# Altium PCB Device.PcbDoc (part 3 of 4)
Units mm, origin at the board's own origin, x right, y up, seen from the top; angles counter-clockwise.
Board outline 139.06 x 99.82 mm, 4 copper layers (Top Layer, GND, PWR, Bottom Layer), stack 1.233 mm thick; 189 components, 163 nets, 636 pads, 1007 vias.
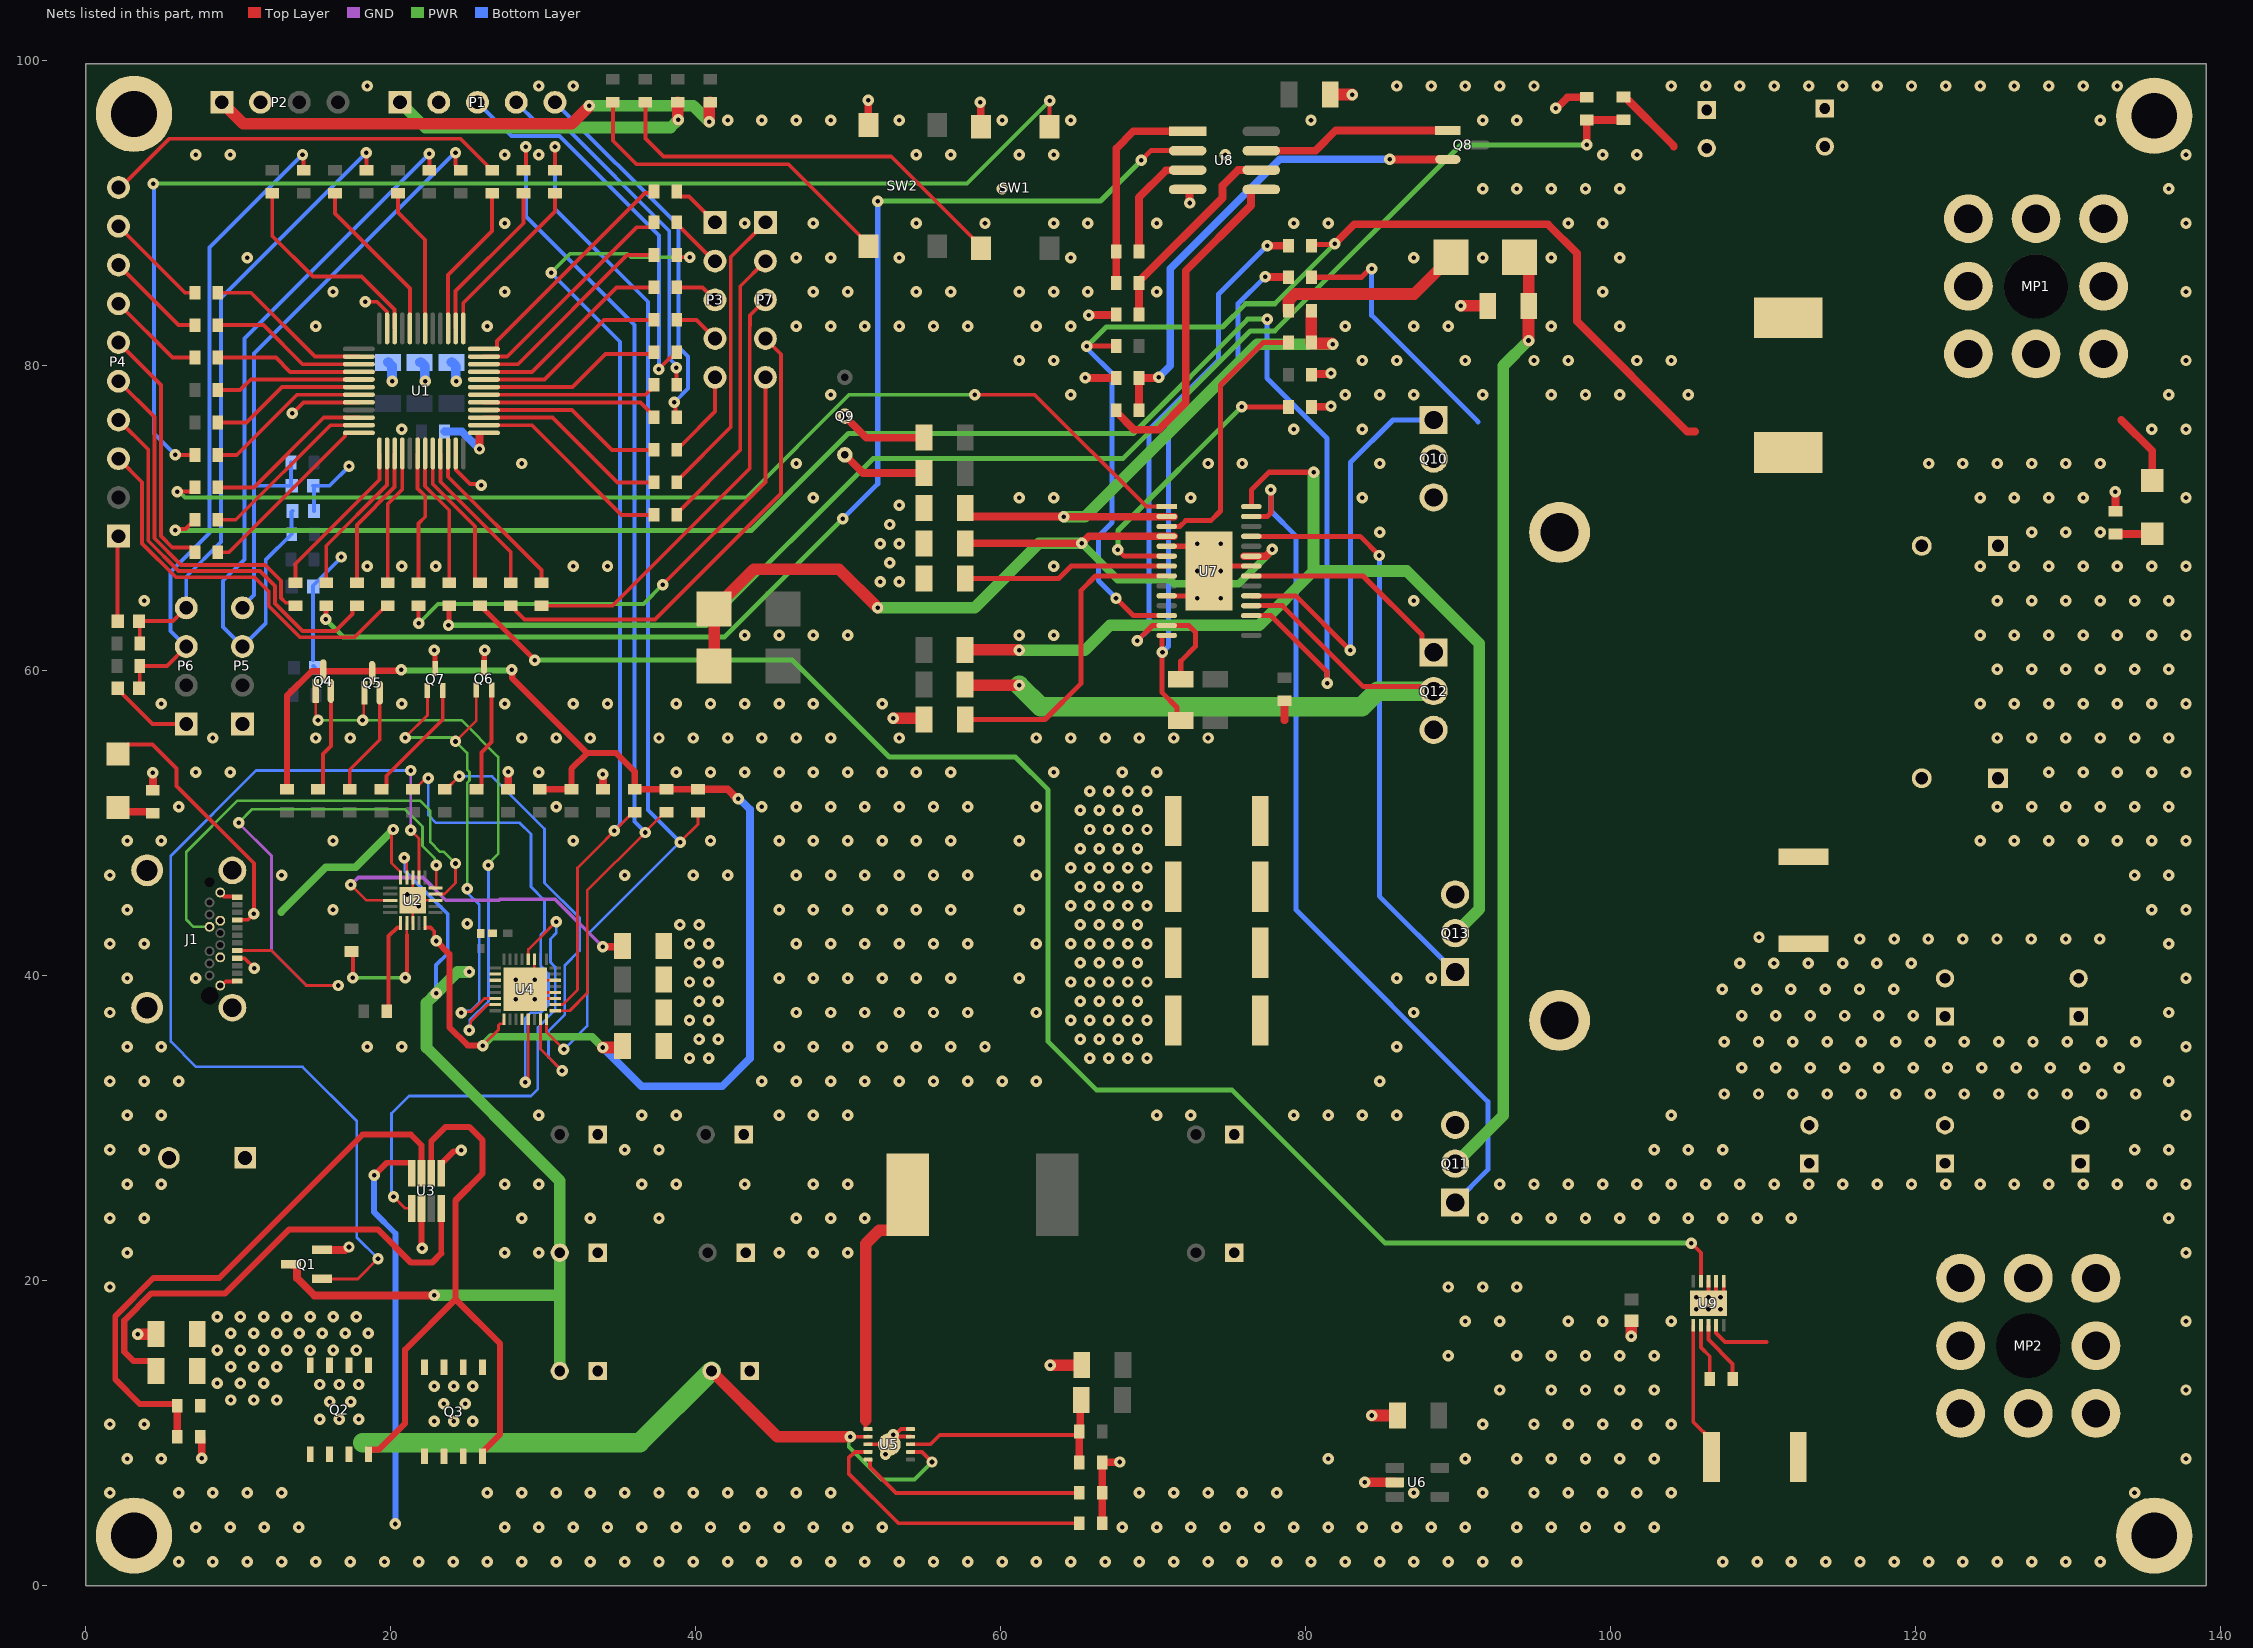
[diagram p4: the nets of this part, all layers, seen from the top]

## Via types
v1: diameter 0.75, hole 0.3, Top Layer to Bottom Layer, tented both sides, 1006 vias
v2: diameter 0.75, hole 0.3, Top Layer to Bottom Layer, tented top, 1 vias

## Nets (pads, with @x,y where several pads share a name; then routed paths per layer and width w, separated by ;. In a path a pad name is that pad's centre, name@x,y a point inside that pad or via, vN(x,y) a via of type N, cw(c..) or ccw(c..) an arc to the next point about the centre after c; other vN are vias at no path point) (continued)
GND: C1.1 C2.1 C3.1 C4.1 C5.1 C6.1 C7.2 C8.1 C9.1 C10.1 C12.1 C13.1 C14.1 C15.1 C16.1 C17.1 C18.1 C19.1 C20.1 C22.1 C23.1 C24.1 C25.1 C26.1 C27.1 C28.1 C29.1 C30.1 C31.1 C32.1 C33.1 C34.2 C35.1 C37.2 C41.1 C42.1 C43.1 C44.1 C45.1 C46.1 C47.1 C48.1 C49.1 C51.1 J1.3@9.632,46.918 J1.4 J1.5 J1.6 J1.A1 J1.A12 J1.B1 J1.B12 P1.2 P2.2 P4.1 P5.1 P6.1 pad.MH1 pad.MH2 pad.MH3 pad.MH4 Q6.3 Q7.3 Q9.2 R54.1 R58.1 R67.1 R68.1 R70.1 R71.1 R72.1 R76.1 R80.2 R81.1 R82.2 R88.1 R89.1 R90.1 R91.1 R92.1 R94.1 R96.1 SW1.3 SW2.3 U1.8 U1.23 U1.47 U2.8 U2.13 U2.18 U2.21 U3.2 U4.11 U4.12 U4.14 U4.19 U4.33 U5.3 U5.9 U5.10 U5.11 U6.2 U7.5 U7.10 U7.22 U7.29 U8.4 U9.1 U9.6 U9.7 U9.8 U9.11 U9.V | length 127.1
  Top Layer w0.178: U2.8@21.463,43.467 U2.21@21.463,44.958 ; U2.18@21.463,46.449 U2.21@21.463,44.958 ; U2.13@22.954,44.958 U2.21@21.463,44.958 ; U4.19@29.429,41.082 U4.33@29.429,39.716 ; v1(29.464,38.481) 29.029,38.916 U4.33@29.851,38.916 ; v1(29.464,39.751) U4.33@29.429,39.716 ; U4.11@30.795,38.516 30.162,38.516 29.851,38.827 U4.33@29.851,38.916 ; U4.12@30.795,38.916 U4.33@29.851,38.916 ; U4.14@30.795,39.716 U4.33@29.429,39.716 ; U4.33@29.429,39.716 U4.33@28.829,39.116 29.651,39.116 U4.33@29.851,38.916
  Top Layer w0.254: C5.1@2.106,58.858 2.106,58.808 4.399,56.515 P6.1@6.604,56.515 ; C4.1@2.106,63.259 2.106,68.781 P4.1@2.159,68.834 ; J1.B12@8.705,45.468 8.812,45.468 9.066,45.214 9.598,45.214 J1.A1@9.602,45.219 ; J1.B1@8.832,39.368 8.939,39.368 9.193,39.622 9.719,39.622 J1.A12@9.731,39.633 ; v1(13.562,76.887) 14.284,77.608 U1.8@17.919,77.608 ; v1(18.336,84.2) 19.106,84.2 19.76,83.546 19.76,82.467 U1.47@19.769,82.458 ; U1.23@24.269,74.258 24.277,74.25 24.277,73.17 25.2,72.248 25.884,72.248 v1(25.956,72.176) ; U5.3@51.302,9.287 U5.11@52.702,9.287 ; 53.34,9.779 53.348,9.787 U5.9@54.102,9.787 ; 53.34,10.16 53.467,10.287 U5.10@54.102,10.287 ; U9.1@105.413,17.094 105.413,10.748 106.603,9.558 R94.1@106.603,8.458 ; U9.V@105.626,18.014 U9.V@105.626,18.148 ; U9.V@106.413,18.936 U9.8@106.413,19.99 ; U9.7@106.913,19.99 106.913,19.314 107.201,19.026 U9.V@107.201,18.954 ; U9.V@107.201,18.936 U9.V@107.201,18.954 ; U9.6@107.413,19.99 107.413,19.167 U9.V@107.201,18.954
  Top Layer w0.33: v1(22.86,61.341) 22.901,61.3 22.901,60.177 Q7.3@22.918,60.16 ; Q6.3@26.124,60.198 26.141,60.215 26.141,61.32 v1(26.162,61.341) ; U7.10@70.885,64.923 72.275,64.923 73.66,66.308 U7.29@73.66,66.548 ; U7.5@70.885,68.173 72.275,68.173 73.66,66.788 U7.29@73.66,66.548 ; U7.29@74.422,66.675 U7.29@74.224,66.873 ; U7.22@76.435,66.873 U7.29@74.224,66.873 ; U7.29@73.66,66.548 73.985,66.873 U7.29@74.224,66.873
  Top Layer w0.381: U3.2@22.027,24.757 22.027,22.169 v1@22.098,22.098
  Top Layer w0.508: R58.1@4.414,52.171 v1(4.414,53.326) ; R54.1@7.519,9.779 7.615,9.683 7.615,9.391 7.62,9.386 v1(7.62,8.382) ; R67.1@27.705,52.239 27.711,52.246 27.711,53.375 v1(27.718,53.382) ; v1(33.909,53.213) 33.934,53.188 R68.1@33.934,52.239 ; Q9.2@49.784,76.708 51.198,75.294 C35.1@54.977,75.294 ; v1(51.308,97.409) 51.326,97.391 51.326,95.814 SW2.3@51.344,95.796 ; C34.2@54.891,56.896 C34.2@54.977,56.81 ; v1(58.674,97.282) 58.692,97.264 58.692,95.687 SW1.3@58.71,95.669 ; v1@65.532,79.248 v1(65.557,79.223) 65.583,79.197 R81.1@67.576,79.197 ; v1(65.786,83.312) 65.816,83.342 67.546,83.342 R80.2@67.576,83.371 ; R71.1@66.656,4.112 R72.1@66.656,6.104 R70.1@66.656,8.097 66.672,8.113 67.803,8.113 v1(67.818,8.128) ; U8.4@72.262,91.567 72.337,91.567 72.39,91.514 v1(72.39,90.678) ; R82.2@80.379,77.301 80.4,77.322 81.64,77.322 v1(81.661,77.343) ; R92.1@80.379,79.417 80.421,79.46 81.619,79.46 v1(81.661,79.502) ; v1(96.393,96.901) 96.458,96.901 97.175,97.618 R96.1@98.425,97.618 ; R76.1@133.096,70.473 v1(133.096,71.755)
  Top Layer w0.635: v1(83.886,6.792) U6.2@85.852,6.792
  Top Layer w0.762: v1(3.429,16.51) C12.1@4.619,16.51 ; v1(52.959,56.896) C34.2@54.891,56.896 ; v1(63.246,14.478) C26.1@65.325,14.478 ; C31.1@81.614,97.79 v1(83.058,97.79) ; v1(84.328,11.176) C23.1@86.026,11.176 ; v1(90.17,83.947) 90.183,83.934 C32.1@91.934,83.934 ; v1(101.346,16.383) 101.346,17.366 101.365,17.385 C51.1@101.367,17.385
  Bottom Layer w0.254: 14.924,60.706 C3.1@14.924,65.532 ; C3.1@14.924,65.582 16.764,67.422 v1(16.764,67.468) ; C6.1@14.936,60.325 C6.1@15.063,60.198 ; C2.1@14.974,70.485 14.974,72.086 C1.1@14.924,72.136 16.002,72.136 v1(17.272,73.406)
  Bottom Layer w0.635: C27.1@19.824,80.228 19.859,80.228 20.092,79.996 20.092,79.015 v1(20.114,78.993) ; C28.1@21.907,80.228 22.018,80.228 22.251,79.996 22.251,79.015 v1(22.273,78.993) ; C29.1@23.991,80.228 24.05,80.228 24.283,79.996 24.283,79.015 v1(24.305,78.993)
  other v1: 6.1,1.6 8.35,1.6 10.6,1.6 12.85,1.6 15.1,1.6 17.35,1.6 19.6,1.6 21.85,1.6 24.1,1.6 26.35,1.6 28.6,1.6 30.85,1.6 33.1,1.6 35.35,1.6 37.6,1.6 39.85,1.6 42.1,1.6 44.35,1.6 46.6,1.6 48.85,1.6 51.1,1.6 53.35,1.6 55.6,1.6 57.85,1.6 60.1,1.6 62.35,1.6 64.6,1.6 66.85,1.6 69.1,1.6 71.35,1.6 73.6,1.6 75.85,1.6 78.1,1.6 80.35,1.6 82.6,1.6 84.85,1.6 87.1,1.6 89.35,1.6 91.6,1.6 93.85,1.6 107.35,1.6 109.6,1.6 111.85,1.6 114.1,1.6 116.35,1.6 118.6,1.6 120.85,1.6 123.1,1.6 125.35,1.6 127.6,1.6 129.85,1.6 132.1,1.6 7.225,3.85 9.475,3.85 11.725,3.85 13.975,3.85 27.475,3.85 29.725,3.85 31.975,3.85 34.225,3.85 36.475,3.85 38.725,3.85 40.975,3.85 43.225,3.85 45.475,3.85 47.725,3.85 49.975,3.85 52.225,3.85 67.975,3.85 70.225,3.85 72.475,3.85 74.725,3.85 76.975,3.85 79.225,3.85 81.475,3.85 83.725,3.85 85.975,3.85 88.225,3.85 90.475,3.85 93.85,3.85 96.1,3.85 98.35,3.85 100.6,3.85 102.85,3.85 1.6,6.1 6.1,6.1 8.35,6.1 10.6,6.1 12.85,6.1 26.35,6.1 28.6,6.1 30.85,6.1 33.1,6.1 35.35,6.1 37.6,6.1 39.85,6.1 42.1,6.1 44.35,6.1 46.6,6.1 48.85,6.1 69.1,6.1 71.35,6.1 73.6,6.1 75.85,6.1 78.1,6.1 87.1,6.1 91.6,6.1 94.975,6.1 97.225,6.1 99.475,6.1 101.725,6.1 103.975,6.1 134.35,6.1 2.725,8.35 4.975,8.35 81.475,8.35 90.475,8.35 93.85,8.35 96.1,8.35 98.35,8.35 100.6,8.35 102.85,8.35 137.725,8.35 52.451,8.636 1.6,10.6 3.85,10.6 91.6,10.6 94.975,10.6 97.225,10.6 99.475,10.6 101.725,10.6 103.975,10.6 92.725,12.85 96.1,12.85 98.35,12.85 100.6,12.85 102.85,12.85 137.725,12.85 89.35,15.1 93.85,15.1 96.1,15.1 98.35,15.1 100.6,15.1 102.85,15.1 90.475,17.35 92.725,17.35 97.225,17.35 99.475,17.35 103.975,17.35 137.725,17.35 1.6,19.6 89.35,19.6 91.6,19.6 93.85,19.6 2.725,21.85 27.475,21.85 29.725,21.85 45.475,21.85 47.725,21.85 49.975,21.85 137.725,21.85 22.063,22.134 1.6,24.1 3.85,24.1 28.6,24.1 33.1,24.1 37.6,24.1 46.6,24.1 48.85,24.1 51.1,24.1 91.6,24.1 93.85,24.1 96.1,24.1 98.35,24.1 100.6,24.1 102.85,24.1 105.1,24.1 107.35,24.1 109.6,24.1 111.85,24.1 136.6,24.1 2.725,26.35 4.975,26.35 27.475,26.35 29.725,26.35 36.475,26.35 38.725,26.35 43.225,26.35 47.725,26.35 49.975,26.35 92.725,26.35 94.975,26.35 97.225,26.35 99.475,26.35 101.725,26.35 103.975,26.35 106.225,26.35 108.475,26.35 110.725,26.35 112.975,26.35 115.225,26.35 117.475,26.35 119.725,26.35 121.975,26.35 124.225,26.35 126.475,26.35 128.725,26.35 130.975,26.35 133.225,26.35 135.475,26.35 137.725,26.35 1.6,28.6 3.85,28.6 35.35,28.6 37.6,28.6 102.85,28.6 105.1,28.6 107.35,28.6 134.35,28.6 136.6,28.6 2.725,30.85 4.975,30.85 29.725,30.85 36.475,30.85 38.725,30.85 45.475,30.85 47.725,30.85 49.975,30.85 70.225,30.85 72.475,30.85 79.225,30.85 81.475,30.85 83.725,30.85 85.975,30.85 103.975,30.85 137.725,30.85 1.6,33.1 3.85,33.1 6.1,33.1 44.35,33.1 46.6,33.1 48.85,33.1 51.1,33.1 53.35,33.1 55.6,33.1 57.85,33.1 60.1,33.1 62.35,33.1 84.85,33.1 136.6,33.1 39.6,34.6 40.85,34.6 65.85,34.6 67.1,34.6 68.35,34.6 69.6,34.6 2.725,35.35 4.975,35.35 18.475,35.35 20.725,35.35 45.475,35.35 47.725,35.35 49.975,35.35 52.225,35.35 54.475,35.35 56.725,35.35 58.975,35.35 85.975,35.35 137.725,35.35 40.225,35.85 41.475,35.85 65.225,35.85 66.475,35.85 67.725,35.85 68.975,35.85 39.6,37.1 40.85,37.1 64.6,37.1 65.85,37.1 67.1,37.1 68.35,37.1 69.6,37.1 1.6,37.6 46.6,37.6 48.85,37.6 51.1,37.6 53.35,37.6 55.6,37.6 57.85,37.6 62.35,37.6 87.1,37.6 136.6,37.6 40.225,38.35 41.475,38.35 65.225,38.35 66.475,38.35 67.725,38.35 68.975,38.35 28.194,38.481 39.6,39.6 40.85,39.6 64.6,39.6 65.85,39.6 67.1,39.6 68.35,39.6 69.6,39.6 28.194,39.751 2.725,39.85 7.225,39.85 45.475,39.85 47.725,39.85 49.975,39.85 52.225,39.85 54.475,39.85 56.725,39.85 61.225,39.85 85.975,39.85 88.225,39.85 137.725,39.85 40.225,40.85 41.475,40.85 65.225,40.85 66.475,40.85 67.725,40.85 68.975,40.85 1.6,42.1 3.85,42.1 39.6,42.1 40.85,42.1 46.6,42.1 48.85,42.1 51.1,42.1 53.35,42.1 55.6,42.1 57.85,42.1 62.35,42.1 64.6,42.1 65.85,42.1 67.1,42.1 68.35,42.1 69.6,42.1 136.6,42.1 38.975,43.35 40.225,43.35 65.225,43.35 66.475,43.35 67.725,43.35 68.975,43.35 25.019,43.434 2.725,44.35 16.225,44.35 45.475,44.35 47.725,44.35 49.975,44.35 52.225,44.35 54.475,44.35 56.725,44.35 61.225,44.35 135.475,44.35 137.725,44.35 21.844,44.577 64.6,44.6 65.85,44.6 67.1,44.6 68.35,44.6 69.6,44.6 21.082,45.339 65.225,45.85 66.475,45.85 67.725,45.85 68.975,45.85 1.6,46.6 12.85,46.6 35.35,46.6 39.85,46.6 42.1,46.6 46.6,46.6 48.85,46.6 51.1,46.6 53.35,46.6 55.6,46.6 57.85,46.6 62.35,46.6 134.35,46.6 136.6,46.6 64.6,47.1 65.85,47.1 67.1,47.1 68.35,47.1 69.6,47.1 65.225,48.35 66.475,48.35 67.725,48.35 68.975,48.35 2.725,48.85 4.975,48.85 16.225,48.85 31.975,48.85 40.975,48.85 45.475,48.85 47.725,48.85 49.975,48.85 52.225,48.85 54.475,48.85 56.725,48.85 61.225,48.85 124.225,48.85 126.475,48.85 128.725,48.85 130.975,48.85 133.225,48.85 135.475,48.85 137.725,48.85 65.85,49.6 67.1,49.6 68.35,49.6 69.6,49.6 65.225,50.85 66.475,50.85 67.725,50.85 68.975,50.85 6.1,51.1 30.85,51.1 44.35,51.1 46.6,51.1 48.85,51.1 51.1,51.1 53.35,51.1 55.6,51.1 57.85,51.1 62.35,51.1 125.35,51.1 127.6,51.1 129.85,51.1 132.1,51.1 134.35,51.1 136.6,51.1 65.85,52.1 67.1,52.1 68.35,52.1 69.6,52.1 7.225,53.35 9.475,53.35 29.725,53.35 38.725,53.35 40.975,53.35 43.225,53.35 45.475,53.35 47.725,53.35 49.975,53.35 52.225,53.35 54.475,53.35 56.725,53.35 63.475,53.35 67.975,53.35 70.225,53.35 128.725,53.35 130.975,53.35 133.225,53.35 135.475,53.35 137.725,53.35 8.35,55.6 15.1,55.6 17.35,55.6 28.6,55.6 30.85,55.6 33.1,55.6 37.6,55.6 39.85,55.6 42.1,55.6 44.35,55.6 46.6,55.6 48.85,55.6 53.35,55.6 62.35,55.6 64.6,55.6 66.85,55.6 69.1,55.6 71.35,55.6 73.6,55.6 125.35,55.6 127.6,55.6 129.85,55.6 132.1,55.6 134.35,55.6 136.6,55.6 4.975,57.85 20.725,57.85 27.475,57.85 31.975,57.85 34.225,57.85 38.725,57.85 40.975,57.85 43.225,57.85 45.475,57.85 47.725,57.85 52.225,57.85 124.225,57.85 126.475,57.85 128.725,57.85 130.975,57.85 133.225,57.85 135.475,57.85 137.725,57.85 125.35,60.1 127.6,60.1 129.85,60.1 132.1,60.1 134.35,60.1 136.6,60.1 43.225,62.35 45.475,62.35 47.725,62.35 49.975,62.35 61.225,62.35 63.475,62.35 124.225,62.35 126.475,62.35 128.725,62.35 130.975,62.35 133.225,62.35 135.475,62.35 137.725,62.35 3.85,64.6 87.1,64.6 125.35,64.6 127.6,64.6 129.85,64.6 132.1,64.6 134.35,64.6 136.6,64.6 72.898,64.77 74.422,64.77 52.1,65.85 53.35,65.85 72.898,66.548 74.422,66.548 18.475,66.85 20.725,66.85 22.975,66.85 31.975,66.85 34.225,66.85 63.475,66.85 124.225,66.85 126.475,66.85 128.725,66.85 130.975,66.85 133.225,66.85 135.475,66.85 137.725,66.85 52.725,67.1 72.898,68.326 74.422,68.326 52.1,68.35 53.35,68.35 84.85,69.1 127.6,69.1 129.85,69.1 132.1,69.1 52.725,69.6 53.35,70.85 47.725,71.35 61.225,71.35 63.475,71.35 72.475,71.35 83.725,71.35 124.225,71.35 126.475,71.35 128.725,71.35 130.975,71.35 137.725,71.35 28.6,73.6 46.6,73.6 73.6,73.6 75.85,73.6 84.85,73.6 120.85,73.6 123.1,73.6 125.35,73.6 127.6,73.6 129.85,73.6 132.1,73.6 20.725,75.85 79.225,75.85 83.725,75.85 135.475,75.85 137.725,75.85 48.85,78.1 64.6,78.1 82.6,78.1 84.85,78.1 87.1,78.1 91.6,78.1 96.1,78.1 98.35,78.1 100.6,78.1 105.1,78.1 136.6,78.1 61.225,80.35 63.475,80.35 83.725,80.35 85.975,80.35 90.475,80.35 94.975,80.35 97.225,80.35 101.725,80.35 103.975,80.35 137.725,80.35 15.1,82.6 26.35,82.6 46.6,82.6 48.85,82.6 51.1,82.6 53.35,82.6 55.6,82.6 57.85,82.6 62.35,82.6 64.6,82.6 82.6,82.6 87.1,82.6 89.35,82.6 96.1,82.6 100.6,82.6 16.225,84.85 27.475,84.85 47.725,84.85 49.975,84.85 54.475,84.85 56.725,84.85 61.225,84.85 63.475,84.85 65.725,84.85 70.225,84.85 99.475,84.85 137.725,84.85 10.6,87.1 46.6,87.1 48.85,87.1 53.35,87.1 64.6,87.1 87.1,87.1 91.6,87.1 96.1,87.1 100.6,87.1 27.475,89.35 43.225,89.35 47.725,89.35 54.475,89.35 58.975,89.35 63.475,89.35 65.725,89.35 70.225,89.35 79.225,89.35 81.475,89.35 97.225,89.35 99.475,89.35 137.725,89.35 60.1,91.6 91.6,91.6 93.85,91.6 96.1,91.6 98.35,91.6 100.6,91.6 136.6,91.6 7.225,93.85 9.475,93.85 27.475,93.85 29.725,93.85 54.475,93.85 56.725,93.85 61.225,93.85 63.475,93.85 74.725,93.85 99.475,93.85 101.725,93.85 137.725,93.85 42.1,96.1 44.35,96.1 46.6,96.1 48.85,96.1 53.35,96.1 60.1,96.1 64.6,96.1 80.35,96.1 91.6,96.1 93.85,96.1 132.1,96.1 18.475,98.35 29.725,98.35 31.975,98.35 85.975,98.35 88.225,98.35 90.475,98.35 92.725,98.35 94.975,98.35 103.975,98.35 106.225,98.35 108.475,98.35 110.725,98.35 112.975,98.35 115.225,98.35 117.475,98.35 119.725,98.35 121.975,98.35 124.225,98.35 126.475,98.35 128.725,98.35 130.975,98.35 133.225,98.35
  other v2: 52.959,9.906
GPIO0: R62.1 U4.5 | length 33.1
  Top Layer w0.178: R62.1@21.475,52.239 21.575,52.239 22.186,52.85 22.37,52.85 v1(22.479,52.959) ; v1(28.829,33.02) 29.029,33.22 U4.5@29.029,37.15
  Bottom Layer w0.178: v1(22.479,52.959) 22.479,50.546 22.987,50.038 28.471,50.038 29.21,49.299 29.21,45.847 30.099,44.958 30.099,42.926 29.845,42.672 29.845,40.64 30.353,40.132 30.353,38.1 29.845,37.592 29.21,37.592 28.829,37.211 v1(28.829,33.02)
GPIO2: R61.1 U4.7 | length 30.3
  Top Layer w0.178: R61.1@23.552,52.239 23.652,52.239 24.499,53.086 v1(24.511,53.086) ; U4.7@29.829,37.15 29.829,35.195 v1(31.242,33.782)
  Bottom Layer w0.178: v1(24.511,53.086) 26.658,53.086 30.099,49.645 30.099,46.101 32.385,43.815 32.385,41.656 31.428,40.699 31.428,37.465 30.353,36.39 30.353,34.671 v1(31.242,33.782)
GPIO6: Q4.1 Q5.1 U4.31 | length 38
  Top Layer w0.178: Q4.1@15.083,58.681 15.098,58.666 15.098,57.066 15.24,56.924 v1(15.24,56.769) ; v1(18.161,56.769) 18.233,56.841 18.233,58.514 Q5.1@18.289,58.57 ; v1(25.146,36.449) 25.255,36.558 25.255,37.002 26.363,38.11 26.857,38.11 U4.31@26.863,38.116
  PWR w0.178: v1(15.24,56.769) v1(18.161,56.769) 24.638,56.769 27.051,54.356 27.051,48.006 26.416,47.371 v1(26.416,47.244)
  Bottom Layer w0.178: v1(25.146,36.449) 25.184,36.487 25.184,37.091 26.416,38.323 v1(26.416,47.244)
GPIO7: Q6.1 Q7.1 U4.30 | length 33
  Top Layer w0.178: v1(20.955,55.626) 22.418,57.089 Q7.1@22.418,58.712 ; v1(24.257,55.372) 25.624,56.739 Q6.1@25.624,58.75 ; v1(24.638,37.592) 24.694,37.648 25.28,37.648 26.148,38.516 U4.30@26.863,38.516
  PWR w0.178: v1(20.955,55.626) 24.003,55.626 v1(24.257,55.372) 25.019,54.61 25.019,53.521 25.178,53.362 25.178,52.81 25.019,52.651 v1(25.019,45.72)
  Bottom Layer w0.178: v1(24.638,37.592) 24.747,37.701 25.255,37.701 25.813,38.259 25.813,44.672 25.019,45.466 v1(25.019,45.72)
HDRV1: Q11.1 U7.27 | length 56.4
  Top Layer w0.33: U7.27@76.435,70.123 77.484,70.123 77.724,70.363 v1(77.724,71.882)
  Bottom Layer w0.33: v1(77.724,71.882) 77.724,70.485 79.375,68.834 79.375,44.323 91.948,31.75 91.948,27.292 Q11.1@89.802,25.146
HDRV2: Q10.1 U7.19 | length 26.9
  Top Layer w0.33: U7.19@76.435,64.923 79.349,64.923 v1(82.931,61.341)
  Bottom Layer w0.33: v1(82.931,61.341) 82.931,73.66 85.725,76.454 Q10.1@88.392,76.454
ISNS+: C40.1 R84.2 U7.14 | length 35.3
  Top Layer w0.33: U7.14@70.885,62.323 70.597,62.323 70.592,62.318 70.592,58.568 71.559,57.602 71.559,57.002 C40.1@71.81,56.75
  Top Layer w0.508: v1(77.343,85.852) 77.364,85.831 78.858,85.831 R84.2@78.879,85.81
  Bottom Layer w0.33: v1(70.612,61.214) 70.993,61.595 70.993,75.311 75.565,79.883 75.565,84.074 v1(77.343,85.852)
ISNS-: C40.2 R85.2 U7.13 | length 38.7
  Top Layer w0.33: v1(68.961,61.976) 69.956,62.971 70.883,62.971 U7.13@70.885,62.973 72.343,62.973 72.771,62.545 72.771,61.595 71.81,60.634 C40.2@71.81,59.45
  Top Layer w0.508: v1(77.47,87.884) R85.2@78.879,87.884
  Bottom Layer w0.33: v1(68.961,61.976) 69.723,62.738 69.723,75.819 74.295,80.391 74.295,84.709 v1(77.47,87.884)
LDO_1V5: U4.4
LDO_3V3: C9.2 Q4.3 Q5.3 R53.2 R55.2 R56.2 R57.2 R65.2 R66.2 U2.10 U4.1 | length 97
  Top Layer w0.178: v1(26.035,35.433) 27.073,36.471 27.073,36.756 27.177,36.86 27.416,36.86 27.429,36.873 U4.1@27.429,37.15
  Top Layer w0.254: U2.10@22.294,43.18 22.606,43.18 22.86,42.926 v1@22.86,42.291
  Top Layer w0.406: R53.2@13.208,52.239 13.208,58.367 14.823,59.982 Q4.3@15.583,59.982 Q5.3@18.784,59.982 ; Q5.3@18.789,59.871 Q5.3@18.789,60.016 ; Q5.3@18.789,60.01 18.793,60.005 20.635,60.005 v1(20.701,60.071) ; v1(22.987,42.291) 23.857,41.421 23.857,36.633 25.05,35.44 26.028,35.44 v1(26.035,35.433) ; v1(27.94,60.071) 27.976,60.035 27.976,59.527 32.893,54.61 ; R65.2@29.781,52.239 R66.2@31.857,52.239 31.857,53.574 32.893,54.61 ; R55.2@40.163,52.239 R56.2@38.087,52.239 R57.2@36.01,52.239 36.01,53.398 34.798,54.61 32.893,54.61
  Top Layer w0.508: R55.2@40.163,52.239 42.1,52.239 42.736,51.603 v1(42.802,51.603)
  Top Layer w0.762: v1(33.909,35.306) 35.116,35.306 C9.2@35.207,35.397
  PWR w0.406: v1(20.701,60.071) 20.752,60.02 27.889,60.02 v1(27.94,60.071)
  PWR w0.508: v1(26.035,35.433) 26.613,36.011 33.204,36.011 v1(33.909,35.306)
  Bottom Layer w0.508: v1(33.909,35.306) 36.449,32.766 41.739,32.766 43.561,34.588 43.561,50.927 42.926,51.562 42.842,51.562 v1(42.802,51.603)
LDRV1: Q13.1 U7.25 | length 38.3
  Top Layer w0.33: U7.25@76.435,68.823 83.577,68.823 v1(84.836,67.564)
  Bottom Layer w0.33: v1(84.836,67.564) 84.836,45.225 Q13.1@89.802,40.259
LDRV2: Q12.1 U7.21 | length 14.3
  Top Layer w0.33: U7.21@76.435,66.223 83.764,66.223 87.637,62.35 87.637,61.969 Q12.1@88.392,61.214
NetC1_2: C1.2 P5.4 R40.2 R46.2 | length 41.1
  Top Layer w0.254: v1(24.257,93.98) 24.257,93.168 24.278,93.147 24.278,93.047 24.501,92.824 R46.2@24.601,92.824
  Bottom Layer w0.254: P5.4@10.287,64.135 10.287,64.21 11.049,64.972 11.049,72.037 ; R40.2@13.474,73.66 13.474,72.186 C1.2@13.524,72.136 11.148,72.136 11.049,72.037 ; v1(24.257,93.98) 24.212,93.98 11.049,80.817 11.049,72.037
NetC2_2: C2.2 P5.3 R41.2 R48.2 | length 49.8
  Top Layer w0.254: R48.2@22.541,92.824 v1(22.541,93.918)
  Bottom Layer w0.254: C2.2@13.574,70.485 13.513,70.424 R41.2@13.513,68.961 11.811,67.259 11.811,63.119 P5.3@10.287,61.595 9.017,62.865 9.017,65.913 10.414,67.31 10.414,81.792 v1(22.541,93.918)
NetC4_2: C4.2 P6.4 R43.2 R47.2 | length 40.8
  Top Layer w0.254: R43.2@3.556,61.792 3.556,63.209 C4.2@3.506,63.259 5.728,63.259 P6.4@6.604,64.135 ; v1(18.415,93.98) 18.42,93.975 R47.2@18.42,92.824
  Bottom Layer w0.254: P6.4@6.604,64.135 6.604,66.169 8.89,68.455 8.89,84.455 v1(18.415,93.98)
NetC5_2: C5.2 P6.3 R44.2 R49.2 | length 42.4
  Top Layer w0.254: C5.2@3.506,58.858 3.556,58.908 R44.2@3.556,60.325 5.334,60.325 P6.3@6.604,61.595 ; v1(14.224,93.853) 14.3,93.777 R49.2@14.3,92.824
  Bottom Layer w0.254: P6.3@6.604,61.595 5.575,62.624 5.575,66.482 8.128,69.035 8.128,87.757 v1(14.224,93.853)
NetC10_2: C10.2 U2.3 | length 23
  Top Layer w0.178: v1(17.399,45.974) 18.415,44.958 U2.3@19.972,44.958
  Top Layer w0.508: v1(33.909,41.91) 35.143,41.91 C10.2@35.207,41.974
  GND w0.254: v1(17.399,45.974) 17.883,46.458 22.115,46.458 23.615,44.958 27.101,44.958 27.171,45.028 30.791,45.028 v1(33.909,41.91)
NetC11_1: C11.1 U3.4 | length 32.2
  Top Layer w0.381: 23.327,21.803 U3.4@23.327,24.757
  Top Layer w0.406: C11.1@4.619,14.097 4.619,14.397 4.272,14.744 3.148,14.744 2.54,15.351 2.54,17.399 4.318,19.177 9.144,19.177 13.335,23.368 19.177,23.368 21.336,21.209 22.733,21.209 23.327,21.803
NetC21_1: C21.1 R69.1 R70.2 U5.8 | length 15.5
  Top Layer w0.254: U5.8@54.102,9.287 55.388,9.287 56.007,9.906 64.933,9.906 R69.1@65.156,10.129
  Top Layer w0.508: R70.2@65.156,8.097 R69.1@65.156,10.129 ; R69.1@65.224,10.197 65.224,12.124 C21.1@65.292,12.192
NetC33_2: C33.2 R77.1 R78.2 U7.2 | length 40
  Top Layer w0.508: C33.2@57.677,70.673 57.677,70.419 57.973,70.123 v1@64.135,70.123 ; v1(64.135,70.104) U7.2@71.374,70.104
  Top Layer w0.762: R77.1@80.379,83.608 R78.2@80.379,81.534 80.379,81.496 80.41,81.465 81.73,81.465 v1(81.788,81.407)
  PWR w0.762: v1(64.135,70.104) 65.532,70.104 76.835,81.407 v1(81.788,81.407)
NetC34_1: C34.1 U7.8 | length 20.7
  Top Layer w0.33: C34.1@57.677,56.81 62.906,56.81 65.278,59.182 65.278,65.278 66.223,66.223 U7.8@70.885,66.223
NetC36_1: C36.1 Q9.1 | length 5.7
  Top Layer w0.508: Q9.1@49.784,74.168 50.969,72.983 C36.1@54.977,72.983
NetC37_1: C37.1 U7.7 | length 13.5
  Top Layer w0.33: C37.1@57.677,66.052 63.807,66.052 64.628,66.873 U7.7@70.885,66.873
NetC41_2: C41.2 C42.2 C43.2 C44.2 C45.2 Q10.2 R84.1 R86.1 | length 17.1
  Top Layer w0.33: R84.1@80.379,85.81 83.664,85.81 84.214,86.36 v1(84.328,86.36)
  Bottom Layer w0.33: v1(84.328,86.36) 84.328,83.312 91.313,76.327
  other v1: 107.442,32.258 109.692,32.258 111.942,32.258 114.192,32.258 116.442,32.258 118.692,32.258 120.942,32.258 123.192,32.258 125.442,32.258 127.692,32.258 129.942,32.258 132.192,32.258 134.442,32.258 108.585,33.972 110.835,33.972 113.085,33.972 115.335,33.972 117.585,33.972 119.835,33.972 122.085,33.972 124.335,33.972 126.585,33.972 128.835,33.972 131.085,33.972 133.335,33.972 107.442,35.687 109.692,35.687 111.942,35.687 114.192,35.687 116.442,35.687 118.692,35.687 120.942,35.687 123.192,35.687 125.442,35.687 127.692,35.687 129.942,35.687 132.192,35.687 134.442,35.687 108.585,37.401 110.835,37.401 113.085,37.401 115.335,37.401 117.585,37.401 119.835,37.401 107.315,39.116 109.565,39.116 111.815,39.116 114.065,39.116 116.315,39.116 118.565,39.116 108.458,40.831 110.708,40.831 112.958,40.831 115.208,40.831 117.458,40.831 119.708,40.831 116.332,42.418 118.582,42.418 120.832,42.418 123.082,42.418 125.332,42.418 127.582,42.418 129.832,42.418 132.082,42.418 109.728,42.545
NetD1_2: D1.2 R58.2 | length 2.4
  Top Layer w0.508: D1.2@2.128,51.052 2.413,50.767 4.318,50.767 R58.2@4.414,50.671
NetD2_2: D2.2 R76.2 | length 2.4
  Top Layer w0.508: R76.2@133.096,68.973 133.104,68.981 135.501,68.981 D2.2@135.509,68.989
NetD3_2: D3.2 R77.2 | length 12.5
  Top Layer w0.762: R77.2@78.879,83.608 78.879,84.263 79.325,84.709 87.122,84.709 D3.2@89.535,87.122
NetL1_2: L1.2 U5.1 | length 17.2
  Top Layer w0.254: 51.148,10.862 51.148,10.294 51.155,10.287 U5.1@51.302,10.287 ; L1.2@53.901,24.346 L1.2@53.901,25.199
  Top Layer w0.762: 51.148,10.862 51.148,22.446 52.032,23.33 52.885,23.33 L1.2@53.901,24.346 ; L1.2@53.901,25.199 L1.2@53.901,25.654
NetP1_1: P1.1 R14.1 | length 20.3
  Top Layer w0.762: R14.1@38.834,97.294 38.834,96.167 v1(38.862,96.139)
  PWR w0.762: P1.1@20.622,97.281 22.272,95.631 38.354,95.631 v1(38.862,96.139)
NetP2_1: P2.1 R16.1 | length 34.8
  Top Layer w0.762: P2.1@8.935,97.282 10.332,95.885 31.877,95.885 33.02,97.028 v1(33.02,97.062) ; v1(40.894,96.012) 40.894,97.223 40.896,97.225 40.896,97.263 40.927,97.294 R16.1@40.965,97.294
  PWR w0.762: v1(33.02,97.062) 39.844,97.062 v1(40.894,96.012)
NetQ1_1: Q1.1 U2.17 | length 65.7
  Top Layer w0.178: Q1.1@15.494,20.132 17.846,20.132 v1(19.177,21.463) ; v1(21.329,49.537) 21.863,49.003 U2.17@21.863,46.449
  GND w0.178: v1(21.329,49.537) 21.329,53.46 v1(21.336,53.467)
  Bottom Layer w0.178: v1(19.177,21.463) 17.78,22.86 17.78,30.48 14.224,34.036 7.239,34.036 5.588,35.687 5.588,47.879 11.176,53.467 v1(21.336,53.467)
NetQ2_1: Q2.1 Q2.2 Q2.3 Q3.1 Q3.2 Q3.3 U3.8 | length 26.9
  Top Layer w0.381: v1(18.923,26.924) 18.929,26.924 19.751,27.747 21.318,27.747 21.377,27.687 U3.8@21.377,27.059
  Bottom Layer w0.381: v1(18.923,26.924) 18.923,24.511 20.32,23.114 v1(20.32,4.064)
NetQ2_4: Q2.4 Q3.4 U3.6 | length 42.2
  Top Layer w0.356: U3.6@22.677,27.059 22.677,29.154
  Top Layer w0.406: Q2.4@18.542,8.636 18.542,8.915 18.567,8.941 19.228,8.941 20.955,10.668 20.955,15.494 24.257,18.796 ; 22.677,29.154 23.622,30.099 25.146,30.099 26.035,29.21 26.035,27.051 24.257,25.273 24.257,18.796 ; Q3.4@26.035,8.509 26.035,8.788 27.178,9.931 27.178,15.875 24.257,18.796
NetQ4_2: Q4.2 R59.2 | length 6.8
  Top Layer w0.254: R59.2@15.246,52.239 15.346,52.239 15.569,52.462 15.569,54.558 16.083,55.072 Q4.2@16.083,58.681
NetQ5_2: Q5.2 R60.2 | length 7.1
  Top Layer w0.254: R60.2@17.323,52.239 17.323,53.518 19.289,55.484 Q5.2@19.289,58.57
NetQ6_2: Q6.2 R63.1 | length 7
  Top Layer w0.254: R63.1@25.628,52.239 25.728,52.239 25.951,52.462 25.951,54.653 26.624,55.326 Q6.2@26.624,58.75
NetQ7_2: Q7.2 R64.1 | length 7.8
  Top Layer w0.254: R64.1@19.722,52.462 19.722,53.123 23.418,56.819 Q7.2@23.418,58.712
NetQ8_1: Q8.1 U8.7 | length 12.8
  Top Layer w0.508: U8.7@77.09,94.107 80.645,94.107 81.976,95.438 Q8.1@89.322,95.438
NetQ8_2: Q8.2 R81.2 R83.1 | length 32
  Top Layer w0.508: R83.1@69.076,77.089 R81.2@69.076,79.197 70.307,79.197 v1(70.358,79.248) ; v1(85.517,93.553) 85.688,93.553 85.703,93.538 Q8.2@89.322,93.538
  Bottom Layer w0.508: v1(70.358,79.248) 71.12,80.01 71.12,86.36 78.313,93.553 v1(85.517,93.553)
NetQ12_3: Q12.3 Q13.3 R87.1 R88.2 R89.2 R90.2 R91.2 | length 1.3
  Top Layer w0.508: 78.613,56.769 R87.1@78.613,58.051
NetR1_1: R1.1 U1.10 | length 11.1
  Top Layer w0.254: R1.1@8.672,72.033 11.045,72.033 15.62,76.608 U1.10@17.919,76.608
NetR1_2: R1.2 U7.1 | length 72.2
  Top Layer w0.254: v1(6.017,71.754) 6.949,71.754 7.172,71.977 R1.2@7.172,72.033 ; v1(58.293,78.105) 62.23,78.105 69.562,70.773 U7.1@70.885,70.773
  PWR w0.254: v1(6.017,71.754) 6.151,71.754 6.531,71.374 43.336,71.374 50.067,78.105 v1(58.293,78.105)
NetR2_2: R2.2 U1.18 | length 8.9
  Top Layer w0.254: U1.18@21.769,74.258 21.769,71.961 22.273,71.457 22.273,70.103 21.837,69.667 21.837,65.782 R2.2@21.828,65.773
NetR3_1: R3.1 U1.11 | length 11.8
  Top Layer w0.254: R3.1@8.672,69.906 9.849,69.906 16.051,76.108 U1.11@17.919,76.108
NetR3_2: R3.2 U7.17 | length 111.7
  Top Layer w0.254: v1(5.89,69.214) 5.97,69.295 6.56,69.295 6.887,69.621 6.987,69.621 7.172,69.806 R3.2@7.172,69.906
  Top Layer w0.33: U7.17@76.435,63.623 77.728,63.623 81.407,59.944 v1(81.407,59.182)
  PWR w0.33: v1(5.89,69.214) 43.663,69.214 50.014,75.565 68.707,75.565 76.2,83.058 v1(77.47,83.058)
  Bottom Layer w0.33: v1(77.47,83.058) 77.47,79.189 81.407,75.252 v1(81.407,59.182)
NetR4_1: R4.1 R93.1 R96.2 | length 93
  Top Layer w0.33: v1(23.797,62.991) 23.82,63.015 23.82,64.25 R4.1@23.844,64.273
  Top Layer w0.508: v1(98.425,94.488) R96.2@98.425,96.118 98.431,96.124 100.832,96.124 R93.1@100.838,96.13
  PWR w0.33: v1(23.797,62.991) 40.703,62.991 51.625,73.914 68.008,73.914 76.391,82.296 77.978,82.296 90.17,94.488 v1(98.425,94.488)
NetR4_2: R4.2 U1.19 | length 9.1
  Top Layer w0.254: U1.19@22.269,74.258 22.269,72.108 23.844,70.532 R4.2@23.844,65.773
NetR5_1: R5.1 U1.12 | length 12.6
  Top Layer w0.254: R5.1@8.672,67.779 9.403,67.779 17.01,75.386 17.01,75.587 17.031,75.608 U1.12@17.919,75.608
NetR6_1: R6.1 U9.9 | length 109.2
  Top Layer w0.254: v1(105.283,22.479) 105.913,21.849 U9.9@105.913,19.99
  Top Layer w0.33: R6.1@25.86,64.31 25.924,64.31 26.145,64.088 26.145,64.025 v1(29.464,60.706)
  PWR w0.33: v1(29.464,60.706) 46.355,60.706 52.705,54.356 60.96,54.356 63.119,52.197 63.119,35.687 66.294,32.512 75.184,32.512 85.217,22.479 v1(105.283,22.479)
NetR6_2: R6.2 U1.20 | length 9.8
  Top Layer w0.254: U1.20@22.769,74.258 22.769,72.255 25.537,69.486 25.537,65.996 25.76,65.773 R6.2@25.86,65.773
NetR7_2: R7.2 SW1.4 | length 27.4
  Top Layer w0.254: R7.2@36.703,97.294 36.703,94.916 37.893,93.726 52.83,93.726 58.189,88.367 58.71,87.846 SW1.4@58.71,87.719
NetR8_1: R8.1 U1.13 | length 10.8
  Top Layer w0.254: R8.1@13.764,65.773 13.764,67.028 19.269,72.533 U1.13@19.269,74.258
NetR9_2: R9.2 U1.39 | length 10.1
  Top Layer w0.254: U1.39@23.769,82.458 23.769,85.956 26.661,88.848 R9.2@26.661,91.324
NetR10_1: R10.1 U1.14 | length 10.1
  Top Layer w0.254: R10.1@15.78,65.773 15.78,68.206 19.769,72.195 U1.14@19.769,74.258
NetR10_2: R10.2 U8.2 | length 82
  Top Layer w0.33: v1(15.748,63.373) 15.764,63.389 15.764,64.258 R10.2@15.78,64.273 ; v1(69.215,93.472) 69.85,94.107 U8.2@72.262,94.107
  PWR w0.33: v1(15.748,63.373) 16.891,62.23 41.91,62.23 v1(49.657,69.977) ; v1(51.943,90.805) 66.548,90.805 v1(69.215,93.472)
  Bottom Layer w0.33: v1(49.657,69.977) 51.943,72.263 v1(51.943,90.805)
NetR11_1: R11.1 U1.15 | length 9.5
  Top Layer w0.254: R11.1@17.796,65.773 17.796,69.575 20.269,72.048 U1.15@20.269,74.258
NetR12_1: R12.1 U1.16 | length 8.9
  Top Layer w0.254: R12.1@19.812,65.773 19.812,70.945 20.769,71.901 U1.16@20.769,74.258
NetR13_2: R13.2 U1.42 | length 9.6
  Top Layer w0.254: R13.2@20.48,91.324 20.48,90.057 22.269,88.268 U1.42@22.269,82.458
NetR15_1: R15.1 U1.29 | length 11.6
  Top Layer w0.254: U1.29@26.119,77.608 36.385,77.608 37.271,76.723 R15.1@37.271,76.623
NetR17_1: R17.1 U1.30 | length 11.5
  Top Layer w0.254: U1.30@26.119,78.108 36.725,78.108 37.271,78.654 R17.1@37.271,78.754
NetR18_1: R18.1 U1.31 | length 12.1
  Top Layer w0.254: U1.31@26.119,78.608 31.921,78.608 34.084,80.771 37.158,80.771 R18.1@37.271,80.884
NetR19_2: R19.2 U1.46 | length 14.1
  Top Layer w0.254: R19.2@12.24,91.324 12.24,88.518 14.907,85.851 18.101,85.851 20.26,83.693 20.26,82.467 U1.46@20.269,82.458
NetR20_1: R20.1 U1.32 | length 12.8
  Top Layer w0.254: U1.32@26.119,79.108 30.09,79.108 33.997,83.015 R20.1@37.271,83.015
NetR21_2: R21.2 U1.26 | length 13.6
  Top Layer w0.254: U1.26@26.119,76.108 29.266,76.108 35.144,70.23 R21.2@37.271,70.23
NetR22_1: R22.1 U1.33 | length 13.4
  Top Layer w0.254: U1.33@26.119,79.608 29.275,79.608 34.812,85.146 R22.1@37.271,85.146
NetR23_2: R23.2 U1.27 | length 12.9
  Top Layer w0.254: U1.27@26.119,76.608 30.627,76.608 34.874,72.361 R23.2@37.271,72.361
NetR24_1: R24.1 U1.34 | length 14.1
  Top Layer w0.254: U1.34@26.119,80.108 28.346,80.108 35.514,87.277 R24.1@37.271,87.277
NetR24_2: R24.2 R57.1 U4.10 | length 64.4
  Top Layer w0.178: U4.10@30.795,38.116 30.801,38.122 31.295,38.122 32.258,39.085 32.258,47.087 35.91,50.739 R57.1@36.01,50.739
  Top Layer w0.254: R24.2@38.771,87.277 38.925,87.122 v1(39.624,87.122)
  PWR w0.254: v1(30.528,86.105) 31.776,87.353 35.517,87.353 35.748,87.122 v1(39.624,87.122)
  Bottom Layer w0.254: v1(30.528,86.105) 35.052,81.581 35.052,49.927 34.671,49.546 v1(34.671,49.53)
NetR25_1: R25.1 U1.37 | length 11.4
  Top Layer w0.254: U1.37@24.769,82.458 24.769,84.121 30.782,90.134 R25.1@30.782,91.324
NetR25_2: R25.2 R55.1 U4.8 | length 72.2
  Top Layer w0.178: U4.8@30.229,37.15 30.229,36.319 v1(31.369,35.179) ; v1(38.989,48.768) 40.163,49.942 R55.1@40.163,50.739
  Top Layer w0.254: R25.2@30.782,92.824 v1(30.782,94.36)
  Bottom Layer w0.178: v1(31.369,35.179) 32.893,36.703 32.893,42.672 v1(38.989,48.768)
  Bottom Layer w0.254: v1(30.782,94.36) 30.782,90.296 36.878,84.2 36.878,50.879 v1(38.989,48.768)
NetR26_2: R26.2 U1.28 | length 12.2
  Top Layer w0.254: U1.28@26.119,77.108 31.905,77.108 34.521,74.492 R26.2@37.271,74.492
NetR27_1: R27.1 U1.38 | length 10.7
  Top Layer w0.254: U1.38@24.269,82.458 24.269,84.901 28.721,89.353 R27.1@28.721,91.324
NetR27_2: R27.2 R56.1 U4.9 | length 66.5
  Top Layer w0.178: U4.9@30.795,37.716 31.747,37.716 32.893,38.862 32.893,45.593 v1(36.703,49.403) 36.703,49.455 37.987,50.739 R56.1@38.087,50.739
  Top Layer w0.254: R27.2@28.721,92.824 28.877,92.98 v1(28.877,94.36)
  Bottom Layer w0.254: v1(28.877,94.36) 28.877,89.788 35.989,82.676 35.989,50.117 v1(36.703,49.403)
NetR28_2: R28.2 U1.5 | length 9.5
  Top Layer w0.254: R28.2@8.672,78.415 10.137,78.415 10.831,79.108 U1.5@17.919,79.108
NetR29_1: R29.1 U1.2 | length 11
  Top Layer w0.254: R29.1@8.672,84.797 10.856,84.797 15.045,80.608 U1.2@17.919,80.608
NetR30_2: R30.2 U1.6 | length 10.2
  Top Layer w0.254: R30.2@8.672,76.288 10.55,76.288 12.871,78.608 U1.6@17.919,78.608
NetR31_1: R31.1 U1.3 | length 10.3
  Top Layer w0.254: R31.1@8.672,82.67 11.67,82.67 14.231,80.108 U1.3@17.919,80.108
NetR32_2: R32.2 U1.35 | length 14.9
  Top Layer w0.254: U1.35@26.119,80.608 27.649,80.608 36.126,89.085 37.048,89.085 37.271,89.308 R32.2@37.271,89.408
NetR33_2: R33.2 SW2.4 | length 22.2
  Top Layer w0.254: R33.2@34.572,97.294 34.572,94.761 36.115,93.218 46.099,93.218 51.344,87.973 SW2.4@51.344,87.846
NetR34_1: R34.1 U1.4 | length 9.6
  Top Layer w0.254: R34.1@8.672,80.542 12.483,80.542 13.417,79.608 U1.4@17.919,79.608
NetR35_2: R35.2 U1.36 | length 15.7
  Top Layer w0.254: U1.36@26.119,81.108 26.966,81.108 26.987,81.13 26.987,81.639 36.688,91.341 37.171,91.341 R35.2@37.271,91.44
NetR36_2: R36.2 U1.44 | length 10.9
  Top Layer w0.254: R36.2@16.36,91.324 16.36,89.986 21.269,85.077 U1.44@21.269,82.458
NetR37_1: R37.1 U1.21 | length 10.4
  Top Layer w0.254: U1.21@23.269,74.258 23.269,72.401 27.876,67.793 R37.1@27.876,65.773
NetR38_1: R38.1 U1.22 | length 11
  Top Layer w0.254: U1.22@23.769,74.258 23.769,72.729 29.893,66.605 R38.1@29.893,65.773
NetR39_2: R39.2 U1.7 | length 10.9
  Top Layer w0.254: R39.2@8.672,74.161 9.91,74.161 13.858,78.108 U1.7@17.919,78.108
NetR50_1: R50.1 U2.7 | length 8.8
  Top Layer w0.178: U2.7@21.063,43.467 21.063,42.691 21.082,42.672
  Top Layer w0.254: R50.1@17.443,41.595 17.526,41.512 v1(17.526,39.878) ; v1(20.955,39.878) 21.05,39.973 21.05,40.243 21.082,40.275 21.082,42.672
  PWR w0.254: v1(17.526,39.878) v1(20.955,39.878)
NetR51_1: R51.1 R54.2 U3.7 | length 38.1
  Top Layer w0.381: R51.1@6.019,11.811 5.892,11.938 3.556,11.938 1.943,13.551 1.943,17.691 4.445,20.193 8.763,20.193 18.161,29.591 21.336,29.591 22.027,28.9 U3.7@22.027,27.059
  Top Layer w0.508: R54.2@6.019,9.779 R51.1@6.019,11.811
NetR52_1: R52.1 U2.6 | length 5.9
  Top Layer w0.254: R52.1@19.873,37.681 19.873,42.606 20.448,43.181 U2.6@20.587,43.181
NetR71_2: R71.2 U5.4 | length 18.9
  Top Layer w0.254: U5.4@51.302,8.787 50.443,8.787 50.038,8.382 50.038,7.366 53.292,4.112 R71.2@65.156,4.112
NetR72_2: R72.2 U5.5 | length 14.8
  Top Layer w0.254: U5.5@51.435,8.202 51.435,7.804 53.135,6.104 R72.2@65.156,6.104
NetR73_1: R73.1 U1.25 | length 3.7
  Top Layer w0.508: v1(25.829,74.548) 25.829,75.437
  Bottom Layer w0.508: R73.1@23.531,75.691 24.686,75.691 v1(25.829,74.548)
NetR74_1: R74.1 R79.2 U8.1 | length 14
  Top Layer w0.508: R79.2@67.576,85.437 R74.1@67.576,87.503 67.576,94.246 68.707,95.377 U8.1@72.262,95.377
NetR74_2: R74.2 U8.3 | length 7.5
  Top Layer w0.508: R74.2@69.076,87.503 69.076,91.047 70.852,92.823 72.248,92.823 U8.3@72.262,92.837
NetR78_1: R78.1 U7.3 | length 17.8
  Top Layer w0.33: U7.3@70.885,69.473 70.887,69.475 71.761,69.475 72.136,69.85 73.787,69.85 74.422,70.485 74.422,78.74 77.216,81.534 R78.1@78.879,81.534
NetR79_1: R79.1 R80.1 U8.6 | length 13.7
  Top Layer w0.508: R80.1@69.076,83.371 R79.1@69.076,85.437 69.076,85.537 74.549,91.01 74.549,91.821 75.565,92.837 U8.6@77.09,92.837
NetR82_1: R82.1 U7.6 | length 19.2
  Top Layer w0.33: v1(67.691,67.945) 68.111,67.525 70.883,67.525 U7.6@70.885,67.523 ; v1(75.806,77.325) 75.818,77.313 78.867,77.313 R82.1@78.879,77.301
  PWR w0.33: v1(67.691,67.945) 67.691,69.21 v1(75.806,77.325)
NetR83_2: R83.2 U8.5 | length 22.3
  Top Layer w0.508: R83.2@67.576,77.089 67.576,76.989 68.746,75.819 70.358,75.819 72.136,77.597 72.136,86.233 76.42,90.517 76.42,91.514 76.473,91.567 U8.5@77.09,91.567
NetR95_1: R95.1 U9.2 | length 3.8
  Top Layer w0.254: U9.2@105.913,17.094 105.913,15.647 106.501,15.059 R95.1@106.501,13.568
NetR95_2: R95.2 U9.3 | length 4.2
  Top Layer w0.254: U9.3@106.413,17.094 106.413,16.147 108.001,14.559 R95.2@108.001,13.568
NRST: R39.1 SW1.1 | length 82.4
  Top Layer w0.254: v1(5.89,74.167) 7.165,74.167 R39.1@7.172,74.161 ; SW1.1@63.21,95.669 63.21,97.373 v1(63.228,97.391)
  PWR w0.254: v1(4.445,91.948) 57.785,91.948 v1(63.228,97.391)
  Bottom Layer w0.254: v1(4.445,91.948) 4.493,91.9 4.493,75.564 v1(5.89,74.167)
PA2: P4.6 R5.2 | length 16.6
  Top Layer w0.254: P4.6@2.159,81.534 4.953,78.74 4.953,68.834 5.685,68.102 6.949,68.102 7.172,67.879 R5.2@7.172,67.779
PA3: P4.5 R8.2 | length 23
  Top Layer w0.254: P4.5@2.159,78.994 4.514,76.639 4.514,68.698 6.258,66.954 11.786,66.954 12.827,65.913 12.827,64.77 13.128,64.469 13.568,64.469 R8.2@13.764,64.273
PA5: P4.4 R11.2 | length 26.4
  Top Layer w0.254: P4.4@2.159,76.454 4.108,74.505 4.108,68.53 6.09,66.548 11.43,66.548 12.421,65.557 12.421,64.421 14.231,62.611 16.383,62.611 17.505,63.733 17.505,64.05 17.728,64.273 R11.2@17.796,64.273
PA6: P4.3 R12.2 | length 26.3
  Top Layer w0.254: P4.3@2.159,73.914 3.702,72.371 3.702,68.361 5.921,66.142 11.074,66.142 12.014,65.202 12.014,64.253 14.063,62.205 17.643,62.205 19.712,64.273 R12.2@19.812,64.273
PA11: P3.4 R20.2 | length 3
  Top Layer w0.254: R20.2@38.771,83.015 40.048,83.015 P3.4@41.275,81.788
PA12: P3.3 R22.2 | length 2.8
  Top Layer w0.254: R22.2@38.771,85.146 40.457,85.146 P3.3@41.275,84.328
PB0: P7.5 R2.1 | length 34.6
  Top Layer w0.254: R2.1@21.828,64.273 21.828,63.135 v1(21.844,63.119) ; v1(37.846,65.659) 44.577,72.39 P7.5@44.577,79.248
  PWR w0.254: v1(21.844,63.119) 23.114,64.389 36.576,64.389 v1(37.846,65.659)
PB3: P4.10 R9.1 | length 26.7
  Top Layer w0.254: P4.10@2.159,91.694 2.28,91.694 5.473,94.888 24.598,94.888 26.338,93.147 26.338,93.047 26.561,92.824 R9.1@26.661,92.824
PB14: P7.2 R21.1 | length 19
  Top Layer w0.254: R21.1@38.771,70.23 38.771,70.33 42.926,74.486 42.926,85.217 P7.2@44.577,86.868
PB15: P7.1 R23.1 | length 19.5
  Top Layer w0.254: R23.1@38.771,72.361 38.771,72.461 42.304,75.995 42.304,87.135 P7.1@44.577,89.408
PC13: P4.9 R29.2 | length 6.8
  Top Layer w0.254: P4.9@2.159,89.154 6.516,84.797 R29.2@7.172,84.797
PC14: P4.8 R31.2 | length 6.6
  Top Layer w0.254: P4.8@2.159,86.614 6.103,82.67 R31.2@7.172,82.67
PC15: P4.7 R34.2 | length 6.5
  Top Layer w0.254: P4.7@2.159,84.074 5.691,80.542 R34.2@7.172,80.542
PD8: P3.5 R26.1 | length 5.9
  Top Layer w0.254: R26.1@38.771,74.492 38.771,74.592 38.994,74.815 39.094,74.815 41.275,76.996 P3.5@41.275,79.248
PE8: P7.4 R37.2 | length 32.2
  Top Layer w0.254: R37.2@27.876,64.273 27.976,64.273 28.199,64.05 28.199,63.95 28.777,63.373 37.338,63.373 45.606,71.641 45.606,80.759 P7.4@44.577,81.788
PE9: P7.3 R38.2 | length 28.9
  Top Layer w0.254: R38.2@29.893,64.273 34.555,64.273 43.548,73.266 43.548,79.245 cw(c44.577,79.248) 43.548,79.248 43.548,81.788 cw(c44.577,81.788) 43.548,81.797 43.561,83.312 43.635,83.386 P7.3@44.577,84.328
PF6: P3.2 R32.1 | length 3.6
  Top Layer w0.254: R32.1@38.771,89.408 38.771,89.308 41.211,86.868 P3.2@41.275,86.868
PF7: P3.1 R35.1 | length 3.4
  Top Layer w0.254: R35.1@38.771,91.44 38.771,91.34 38.994,91.117 39.566,91.117 P3.1@41.275,89.408
PP_EN: U3.1 U4.20 | length 32.2
  Top Layer w0.178: v1(20.193,25.527) 20.963,24.757 U3.1@21.377,24.757 ; U4.20@29.029,41.082 29.035,41.088 29.035,41.735 v1(30.861,43.561)
  Bottom Layer w0.178: v1(20.193,25.527) 20.066,25.654 20.066,30.988 21.209,32.131 29.21,32.131 29.656,32.577 29.656,36.625 30.795,37.764 30.795,40.579 30.48,40.894 30.48,42.418 30.861,42.799 v1(30.861,43.561)
PPEXT: C32.2 D3.1 Q3.5 Q3.6 Q3.7 Q3.8 Q11.2 | length 61.7
  Top Layer w0.762: D3.1@94.035,87.122 94.634,86.523 C32.2@94.634,83.934 94.615,83.915 v1(94.615,81.661)
  PWR w0.762: Q11.2@89.802,27.686 92.964,30.848 92.964,80.01 v1(94.615,81.661)
  other v1: 22.86,10.795 24.13,10.795 25.4,10.795 23.495,11.938 24.892,11.938 22.86,13.081 24.13,13.081 25.4,13.081
SBU1: J1.A8 U2.15 | length 39.5
  Top Layer w0.178: J1.A8@9.942,41.668 12.18,41.668 14.478,39.37 v1(16.579,39.37) ; U2.15@22.954,45.758 22.987,45.791 v1(22.987,47.244)
  GND w0.178: v1(10.033,50.038) 12.192,47.879 12.192,41.656 14.478,39.37 v1(16.579,39.37)
  PWR w0.178: v1(10.033,50.038) 10.922,50.927 20.955,50.927 22.098,49.784 22.098,48.514 22.902,47.71 22.902,47.329 v1(22.987,47.244)
SBU2: J1.B8 U2.14 | length 31
  Top Layer w0.178: U2.14@22.954,45.358 22.961,45.365 23.536,45.365 24.257,46.087 v1(24.257,47.371)
  PWR w0.178: J1.B8@8.132,43.218 7.074,43.218 6.604,43.688 6.604,48.133 9.96,51.489 21.917,51.489 22.606,50.8 22.606,48.768 23.241,48.133 23.495,48.133 v1(24.257,47.371)
SW1: C38.1 L3.1 Q11.3 Q13.2 U7.28 | length 69.6
  Top Layer w0.33: U7.28@76.435,70.773 76.435,71.863 77.597,73.025 v1(80.518,73.025)
  Top Layer w0.762: C38.1@57.672,61.378 61.177,61.378 v1(61.214,61.341)
  PWR w0.762: v1(61.214,61.341) 65.521,61.341 67.172,62.992 76.962,62.992 80.518,66.548 ; v1(80.518,73.025) 80.518,66.548 ; Q13.2@89.802,42.799 91.372,44.369 91.372,61.794 86.618,66.548 80.518,66.548
SW2: C39.1 L3.2 Q10.3 Q12.2 U7.18 | length 46
  Top Layer w0.33: U7.18@76.435,64.273 78.475,64.273 83.783,58.965 88.101,58.965 Q12.2@88.392,58.674
  Top Layer w0.762: C39.1@57.672,59.117 57.734,59.055 v1(61.214,59.055)
  PWR w1.27: v1(61.214,59.055) 62.611,57.658 83.693,57.658 84.709,58.674 Q12.2@88.392,58.674
USART_CK: P1.5 R15.2 | length 24.7
  Top Layer w0.254: v1(38.608,77.616) 38.689,77.535 38.689,76.704 R15.2@38.771,76.623
  Bottom Layer w0.254: P1.5@30.782,97.281 38.871,89.192 38.871,81.234 39.497,80.608 39.497,78.505 v1(38.608,77.616)
USART_RX: P1.3 R18.2 | length 26
  Top Layer w0.254: v1(37.573,79.778) 38.356,80.561 38.548,80.561 38.771,80.784 R18.2@38.771,80.884
  Bottom Layer w0.254: P1.3@25.702,97.281 27.917,95.066 31.074,95.066 37.592,88.547 37.592,79.797 v1(37.573,79.778)
USART_TX: P1.4 R17.2 | length 23.7
  Top Layer w0.254: v1(38.735,79.883) 38.753,79.865 38.753,78.871 R17.2@38.771,78.854
  Bottom Layer w0.254: P1.4@28.242,97.281 29.638,95.885 31.242,95.885 38.275,88.852 38.275,80.478 38.735,80.017 v1(38.735,79.883)
VBUS: C7.1 C11.2 C12.2 C22.2 D1.1 J1.A4 J1.A9 J1.B4 J1.B9 Q1.2 Q2.5 Q2.6 Q2.7 Q2.8 R51.2 U2.20 U3.5 U5.2 U5.7 | length 82.3
  Top Layer w0.178: v1(20.181,49.6) 20.072,49.491 20.072,49.215 20.066,49.21 20.066,47.415 20.663,46.818 U2.20@20.663,46.449
  Top Layer w0.229: J1.A9@9.942,41.168 9.949,41.161 10.424,41.161 11.049,40.535 v1(11.049,40.513) ; J1.A4@9.942,43.668 10.634,43.668 v1(11.035,44.069)
  Top Layer w0.254: D1.1@2.128,54.552 2.751,55.175 4.388,55.175 5.969,53.594 5.969,52.451 11.035,47.385 v1(11.035,44.069) ; v1(50.127,9.781) 50.13,9.784 51.299,9.784 U5.2@51.302,9.787 ; U5.7@54.102,8.787 54.84,8.787 v1(55.499,8.128)
  Top Layer w0.381: U3.5@23.327,27.059 23.327,27.687 24.144,28.504 24.567,28.504 v1(24.638,28.575)
  Top Layer w0.508: Q1.2@15.494,22.032 17.014,22.032 17.207,22.225 v1(17.272,22.225)
  Top Layer w0.762: C22.2@41.041,14.097 45.357,9.781 v1(50.127,9.781)
  PWR w0.254: v1(50.127,9.781) 50.163,9.781 50.165,9.779 50.038,9.652 50.038,9.144 52.197,6.985 54.356,6.985 v1(55.499,8.128)
  PWR w0.508: 12.827,44.196 15.748,47.117 17.698,47.117 v1(20.181,49.6)
  PWR w1.27: 18.161,9.398 36.342,9.398 C22.2@41.041,14.097
  other v1: 15.367,10.922 16.637,10.922 17.907,10.922 16.002,12.065 17.399,12.065 9.525,12.192 11.025,12.192 12.525,12.192 15.367,13.208 16.637,13.208 17.907,13.208 8.636,13.284 10.157,13.284 11.678,13.284 9.525,14.376 11.025,14.376 12.525,14.376 8.636,15.469 10.157,15.469 11.678,15.469 13.199,15.469 14.721,15.469 16.242,15.469 17.763,15.469 9.525,16.561 11.025,16.561 12.525,16.561 14.025,16.561 15.525,16.561 17.025,16.561 18.525,16.561 8.636,17.653 10.157,17.653 11.678,17.653 13.199,17.653 14.721,17.653 16.242,17.653 17.763,17.653
VBUS_LV: C8.2 C20.2 Q1.3 U2.19 U4.26 U4.27 | length 62.1
  Top Layer w0.178: v1(20.885,47.74) 20.885,47.585 21.063,47.407 U2.19@21.063,46.449
  Top Layer w0.508: Q1.3@13.462,21.082 13.843,21.082 13.868,21.057 13.868,20.171 14.99,19.05 v1(22.86,19.05)
  PWR w0.762: v1(22.86,19.05) 31.091,19.05 ; v1(25.146,40.259) 24.384,40.259 24.13,40.005 v1(22.987,38.862) 22.352,38.227 22.352,35.306 31.091,26.567 C20.2@31.091,21.852 31.091,19.05 ; C8.2@31.091,14.097 31.091,19.05
  Bottom Layer w0.254: v1(20.885,47.74) 20.961,47.664 20.961,46.857 23.749,44.069 23.749,41.469 22.987,40.707 v1(22.987,38.862)
VCC: C30.2 D4.1 D5.1 U7.4 U7.23 | length 62.3
  Top Layer w0.508: C30.2@57.677,68.362 v1(65.314,68.362) 65.775,68.823 U7.4@70.885,68.823 U7.4@71.374,68.823 ; U7.23@75.946,67.523 77.375,67.523 v1(77.814,67.962)
  Top Layer w0.762: D5.1@41.22,60.325 D4.1@41.22,64.072 43.823,66.675 49.403,66.675 v1(51.943,64.135)
  PWR w0.508: v1(65.314,68.362) 67.694,65.983 71.129,65.983 71.397,65.716 75.622,65.716 77.851,67.945 77.83,67.945 v1(77.814,67.962)
  PWR w0.762: v1(51.943,64.135) 58.293,64.135 62.52,68.362 v1(65.314,68.362)
VOSNS: C46.2 C47.2 L2.2 R75.2 R85.1 R86.2 U7.12 | length 76.8
  Top Layer w0.33: v1(65.659,81.28) 65.672,81.293 67.563,81.293 R75.2@67.576,81.305 ; v1(67.564,64.77) 68.711,63.623 U7.12@70.885,63.623 ; R85.1@80.379,87.884 80.443,87.947 81.851,87.947 v1(81.915,88.011)
  Top Layer w0.508: v1(81.915,88.011) 83.185,89.281 95.885,89.281 97.79,87.376 97.79,82.931 105.029,75.692 105.537,75.692
  PWR w0.33: v1(65.659,81.28) 66.929,82.55 74.549,82.55 76.073,84.074 77.978,84.074 v1(81.915,88.011)
  Bottom Layer w0.33: v1(65.659,81.28) 65.659,81.166 65.786,81.039 65.786,81.026 67.31,79.502 67.31,69.723 66.421,68.834 66.421,65.913 v1(67.564,64.77)
VOUT+: C48.2 C49.2 D2.1 L2.1 MP1.1 R93.2 | length 9.5
  Top Layer w0.508: R93.2@100.838,97.63 100.938,97.63 104.14,94.428 104.14,94.361 ; 133.477,76.454 135.509,74.422 D2.1@135.509,72.489
VOUT-: MP2.1 R94.2 U9.4 | length 4.1
  Top Layer w0.254: U9.4@106.913,17.094 106.913,16.594 107.505,16.002 110.236,16.002
pads on no net: J1.2 J1.3@8.132,46.143 J1.A2 J1.A3 J1.A10 J1.A11 J1.B2 J1.B3 J1.B10 J1.B11 MP1.MH1 MP2.MH1 Q9.3 SW1.2 SW2.2 U3.3 U4.13 U4.15 U4.16 U4.17 U4.21 U5.6 U6.4 U7.24

## Polygon pours and split planes (outlines as drawn)
GND on Top Layer "GNDpour" (solid, remove dead copper, pour order 52): 0,99.822 139.065,99.822 139.065,0 0,0
GND on Top Layer "GND" (solid, remove dead copper, pour order 50): 106.934,12.192 108.585,10.541 108.585,4.572 105.791,1.778 94.996,1.778 92.202,4.572 92.202,10.922 95.377,14.097 102.997,14.097 104.902,12.192
GND on Top Layer "GND" (solid, remove dead copper, pour order 40): 71.882,53.848 73.66,52.07 73.66,34.544 72.39,33.274 66.421,33.274 63.5,36.195 63.5,50.419 66.929,53.848 72.009,53.848
VOSNS on Top Layer "VOUT+" (solid, remove dead copper, pour order 43): 104.521,75.819 106.68,77.978 115.189,77.978 123.19,69.977 123.19,49.403 119.507,45.72 108.204,45.72 104.521,49.403 104.521,71.501
VOUT- on Top Layer "VOUT-" (solid, remove dead copper, pour order 49): 109.982,4.572 109.982,20.574 114.046,24.638 133.477,24.638 136.652,21.463 136.652,9.398 129.413,2.159 112.395,2.159
NetQ2_1 on Top Layer "NetQ2_1" (solid, remove dead copper, pour order 48): 14.224,9.271 17.653,9.271 18.034,8.89 18.034,8.001 18.288,7.747 21.336,7.747 21.59,8.001 21.59,9.144 21.971,9.525 25.019,9.525 25.4,9.144 25.4,4.572 23.368,2.54 16.129,2.54 13.843,4.826 13.843,8.89
SW2 on Top Layer "SW2" (solid, remove dead copper, pour order 17): 87.503,57.658 86.995,58.166 86.995,59.436 87.503,59.944 89.535,59.944 89.789,60.198 89.789,62.992 86.106,66.675 86.106,71.501 87.249,72.644 90.043,72.644 91.948,74.549 100.457,74.549 103.632,71.374 103.632,59.944 101.346,57.658
NetC41_2 on Top Layer "NETC34_2" (solid, remove dead copper, pour order 44): 105.664,41.402 108.458,44.196 131.572,44.196 135.763,40.005 135.763,31.623 132.842,28.702 109.093,28.702 105.664,32.131
VOUT+ on Top Layer "VOUT+" (solid, remove dead copper, pour order 42): 105.156,95.758 131.064,95.758 137.16,89.662 137.16,79.756 132.461,75.057 119.253,75.057 115.062,79.248 106.299,79.248 102.235,83.312 102.235,92.837
NetQ12_3 on Top Layer "NetQ12_3" (solid, remove dead copper, pour order 41): 75.057,34.544 75.057,54.61 77.597,57.15 90.551,57.15 92.202,55.499 92.202,45.593 90.932,44.323 87.884,44.323 84.709,41.148 84.709,35.052 82.931,33.274 76.327,33.274
5V on Top Layer "Top Layer-5V" (solid, remove dead copper, pour order 37): 25.861,38.815 27.242,38.815 27.243,38.814 27.243,39.418 24.884,39.418 24.441,38.974 24.441,38.496 24.78,38.157 25.203,38.157
VBUS_LV on Top Layer "VBUS_LV" (solid, remove dead copper, pour order 39): 27.245,40.218 27.243,40.217 27.243,39.616 26.043,39.616 24.9,39.616 24.511,40.005 24.511,40.513 24.893,40.895 25.533,40.888 25.781,40.64 25.781,40.386 25.934,40.213
GND on Top Layer "GND" (solid, remove dead copper, pour order 34): 36.957,34.798 38.1,33.655 41.021,33.655 42.291,34.925 42.291,42.799 41.021,44.069 37.973,44.069 36.957,43.053
VBUS on Top Layer "VBUS" (solid, remove dead copper, pour order 31): 6.223,17.78 6.223,12.907 6.769,12.361 6.769,11.265 7.239,10.795 9.017,10.795 10.287,9.525 19.177,9.525 20.066,10.414 20.066,17.399 19.05,18.415 6.858,18.415
SW1 on Top Layer "SW1" (solid, remove dead copper, pour order 21): 104.267,41.186 101.488,43.815 88.9,43.815 88.392,43.307 88.392,42.037 88.9,41.529 90.788,41.529 91.186,41.131 91.186,39.116 90.424,38.354 87.376,35.306 87.376,30.099 88.519,28.956 100.965,28.956 104.267,32.258
GND on Top Layer "GND" (solid, remove dead copper, pour order 15): 23.876,44.069 26.289,44.069 27.051,43.307 27.051,42.291 25.019,42.291 23.876,43.434 23.876,43.561
GND on Top Layer "GND" (solid, remove dead copper, pour order 7): 56.134,64.516 56.134,71.755 52.705,71.755 51.181,70.231 51.181,66.167 52.832,64.516
GND on PWR "GNDpour" (solid, remove dead copper, pour order 51): 0,99.822 139.065,99.822 139.065,0 0,0